# EAGLE board CT_schematic (EAGLE 7.6.0)

Size 100 x 80 mm. Coordinates in mm from the lower left corner, seen from the top.
Outline: 0,0 100,0 100,80 0,80 0,0
Copper layers (1*16): Top 0.035mm / dielectric 1.5mm / Bottom 0.035mm
Design rules "default": minimum track width 10mil, minimum drill 24mil, track to track 8mil, track to pad 8mil, pad to pad 8mil, via to via 8mil, smd to smd 8mil, copper to edge 40mil, drill to drill 8mil, minimum pad ring 10mil, minimum via ring 8mil, stop-mask expansion 4mil, vias tented up to drill 0mil, thermal gap 10mil

## Footprints (pad centres in the part's own frame; a part is rotated, then mirrored left to right if it is on the bottom)
C0603 = smd 0.8 x 0.8: 1 -0.762,0; 2 0.762,0
C0402 = smd 0.5 x 0.5: 1 -0.508,0; 2 0.508,0
C1210 = smd 1.2 x 2.5: 1 -1.524,0; 2 1.524,0
EXV-9H = smd 3.505 x 1.676: 1 -2.857,0; 2 2.857,0
PJ-037B_PACKAGE = drill 3.7 square: 1 12,0 | drill 3.2 square: 2 6,0
R0603 = smd 0.8 x 0.8: 1 -0.762,0; 2 0.762,0
WLCSP48 = smd 0.28 x 0.28: A1 0,0; A2 0.4,0; A3 0.8,0; A4 1.2,0; A5 1.6,0; A6 2,0; A7 2.4,0; B1 0,-0.4; B2 0.4,-0.4; B3 0.8,-0.4; B4 1.2,-0.4; B5 1.6,-0.4; B6 2,-0.4; B7 2.4,-0.4; C1 0,-0.8; C2 0.4,-0.8; C3 0.8,-0.8; C4 1.2,-0.8; C5 1.6,-0.8; C6 2,-0.8; C7 2.4,-0.8; D1 0,-1.2; D2 0.4,-1.2; D3 0.8,-1.2; D4 1.2,-1.2; D5 1.6,-1.2; D6 2,-1.2; D7 2.4,-1.2; E1 0,-1.6; E2 0.4,-1.6; E3 0.8,-1.6; E4 1.2,-1.6; E5 1.6,-1.6; E6 2,-1.6; E7 2.4,-1.6; F1 0,-2; F2 0.4,-2; F3 0.8,-2; F4 1.2,-2; F5 1.6,-2; F6 2,-2; F7 2.4,-2; G1 0,-2.4; G2 0.4,-2.4; G3 0.8,-2.4; G4 1.2,-2.4; G5 1.6,-2.4; G6 2,-2.4; G7 2.4,-2.4
TDFN-8/6MM = smd 0.3 x 0.75: 1 0,0; 2 0.5,0; 3 1,0; 4 1.5,0; 5 1.5,3; 6 1,3; 7 0.5,3; 8 0,3
SOIC-8 = smd 1.6 x 0.6: 1 -2.7,1.905 | smd 1.55 x 0.6: 2 -2.7,0.635; 3 -2.7,-0.635; 4 -2.7,-1.905; 5 2.7,-1.905; 6 2.7,-0.635; 7 2.7,0.635; 8 2.7,1.905
182-009-MALE = drill 1.194 pad 1.524 octagon: 1 -5.537,10.923; 2 -2.769,10.923; 3 0,10.923; 4 2.769,10.923; 5 5.537,10.923; 6 -4.153,8.08; 7 -1.384,8.08; 8 1.384,8.08; 9 4.153,8.08 | hole 3.048: -12.446,9.501; 12.446,9.501
TSSOP20-I = smd 0.4 x 1.35: 1 -2.925,-2.875; 2 -2.275,-2.875; 3 -1.625,-2.875; 4 -0.975,-2.875; 5 -0.325,-2.875; 6 0.325,-2.875; 7 0.975,-2.875; 8 1.625,-2.875; 9 2.275,-2.875; 10 2.925,-2.875; 11 2.925,2.875; 12 2.275,2.875; 13 1.625,2.875; 14 0.975,2.875; 15 0.325,2.875; 16 -0.325,2.875; 17 -0.975,2.875; 18 -1.625,2.875; 19 -2.275,2.875; 20 -2.925,2.875
HTSS-105-01-G-D = drill 1 pad 1.8 square: 1 0,0 | drill 1 pad 1.8: 2 0,2.54; 3 2.54,0; 4 2.54,2.54; 5 5.08,0; 6 5.08,2.54; 7 7.62,0; 8 7.62,2.54; 9 10.16,0; 10 10.16,2.54
ABS07-32.768KHZ-7-T = smd 1.1 x 2.4: 1 -2.5,0; 2 0,0
ASFL1 = smd 1.7 x 1.5: 1 -1.27,-1.1; 2 1.27,-1.1; 3 1.27,1.1; 4 -1.27,1.1
SOIC-8_EP = smd 1.6 x 0.533: 1 -2.921,1.905; 2 -2.921,0.635; 3 -2.921,-0.635; 4 -2.921,-1.905; 5 2.921,-1.905; 6 2.921,-0.635; 7 2.921,0.635; 8 2.921,1.905 | smd 2.54 x 3.302: EPAD 0,0 | drill 0.406 pad 0.406: P$1 -0.508,0.635; P$2 0.381,0.635; P$3 -0.508,-0.635; P$4 0.381,-0.635
WSON-8 = smd 0.3 x 0.6: 1 -0.75,0; 2 0.05,0; 3 0.85,0; 4 1.65,0; 5 1.65,3.8; 6 0.85,3.8; 7 0.05,3.8; 8 -0.75,3.8 | smd 3 x 2.6: PAD 0.45,1.9
SON-6 = smd 0.55 x 0.3: 1 -0.355,0.5 | smd 0.52 x 0.3: 2 -0.37,0; 3 -0.37,-0.5; 4 0.37,-0.5; 5 0.37,0; 6 0.37,0.5
SW_4-1437565-2 = smd 1.4 x 2.1: 1 -2.23,4.55; 2 -2.23,-4.55; 3 2.23,4.55; 4 2.23,-4.55
LGM67K-G1J2-24-Z = smd 0.8 x 1.4: A -2,0; C 0,0
NC7SZ125M5X = smd 1.3 x 0.7: 1 -1.3,0.95; 2 -1.3,0; 3 -1.3,-0.95; 4 1.3,-0.95; 5 1.3,0.95

## Placement (x,y rotation side)
C1  1e-06  [C0603]  -38.1,69.85 0 top  (outside the outline)
C2  1e-07  [C0603]  -41.91,69.85 0 top  (outside the outline)
C3  1e-07  [C0603]  -45.72,69.85 0 top  (outside the outline)
C4  1e-07  [C0603]  -49.53,69.85 0 top  (outside the outline)
C5  1e-07  [C0603]  -53.34,69.85 0 top  (outside the outline)
C6  1e-07  [C0603]  -57.15,69.85 0 top  (outside the outline)
C7  4.7e-06  [C0603]  -34.29,69.85 0 top  (outside the outline)
C8  1e-08  [C0603]  -60.96,69.85 0 top  (outside the outline)
C9  1e-06  [C0603]  -64.77,69.85 0 top  (outside the outline)
C10  1e-11  [C0402]  -53.34,74.93 0 top  (outside the outline)
C11  1e-11  [C0402]  -57.15,74.93 0 top  (outside the outline)
C12  1e-08  [C0402]  -60.96,74.93 0 top  (outside the outline)
C13  1e-08  [C0402]  -64.77,74.93 0 top  (outside the outline)
C14  1e-06  [C0603]  -68.58,69.85 0 top  (outside the outline)
C15  1e-06  [C0603]  -72.39,69.85 0 top  (outside the outline)
C16  1e-07  [C0402]  -68.58,74.93 0 top  (outside the outline)
C17  1e-07  [C0402]  -72.39,74.93 0 top  (outside the outline)
C18  1e-07  [C0402]  -76.2,74.93 0 top  (outside the outline)
C19  1e-07  [C0402]  -15.24,80.01 0 top  (outside the outline)
C20  1e-07  [C0402]  -19.05,80.01 0 top  (outside the outline)
C21  1e-07  [C0402]  -22.86,80.01 0 top  (outside the outline)
C22  1e-07  [C0402]  -26.67,80.01 0 top  (outside the outline)
C23  1e-07  [C0402]  -30.48,80.01 0 top  (outside the outline)
C24  1e-07  [C0402]  -34.29,80.01 0 top  (outside the outline)
C25  1e-07  [C0402]  -38.1,80.01 0 top  (outside the outline)
C26  1e-07  [C0402]  -41.91,80.01 0 top  (outside the outline)
C27  1e-07  [C0402]  -45.72,80.01 0 top  (outside the outline)
C28  1e-08  [C0402]  -49.53,80.01 0 top  (outside the outline)
C29  1e-05  [C1210]  -72.39,57.15 0 top  (outside the outline)
C30  1e-05  [C1210]  -16.51,63.5 0 top  (outside the outline)
C31  1e-05  [C1210]  -22.86,63.5 0 top  (outside the outline)
C32  1e-05  [C1210]  -29.21,63.5 0 top  (outside the outline)
C33  1e-06  [C0603]  -76.2,69.85 0 top  (outside the outline)
C34  1e-05  [C1210]  -35.56,63.5 0 top  (outside the outline)
C35  1e-07  [C0402]  -53.34,80.01 0 top  (outside the outline)
C36  0.0001  [EXV-9H]  -54.61,48.26 0 top  (outside the outline)
C37  0.0001  [EXV-9H]  -66.04,48.26 0 top  (outside the outline)
C38  1e-08  [C0402]  -57.15,80.01 0 top  (outside the outline)
J1  PJ-037B  [PJ-037B_PACKAGE]  -67.31,7.62 0 top  (outside the outline)
R1  10000.0  [R0603]  -15.24,69.85 0 top  (outside the outline)
R2  1000.0  [R0603]  -15.24,74.93 0 top  (outside the outline)
R3  1600.5  [R0603]  -19.05,74.93 0 top  (outside the outline)
R4  4700.0  [R0603]  -22.86,74.93 0 top  (outside the outline)
R5  2200.0  [R0603]  -26.67,74.93 0 top  (outside the outline)
R6  2200.0  [R0603]  -30.48,74.93 0 top  (outside the outline)
R7  2200.0  [R0603]  -34.29,74.93 0 top  (outside the outline)
R8  2200.0  [R0603]  -38.1,74.93 0 top  (outside the outline)
R9  10000.0  [R0603]  -20.32,69.85 0 top  (outside the outline)
R10  120.0  [R0603]  -41.91,74.93 0 top  (outside the outline)
R11  4031.5447154472  [R0603]  -50.8,63.5 0 top  (outside the outline)
R12  2200.0  [R0603]  -45.72,74.93 0 top  (outside the outline)
R13  100000.0  [R0603]  -55.88,63.5 0 top  (outside the outline)
R14  300000.0  [R0603]  -60.96,63.5 0 top  (outside the outline)
R15  100000.0  [R0603]  -66.04,63.5 0 top  (outside the outline)
R16  10000.0  [R0603]  -25.4,69.85 0 top  (outside the outline)
R17  10000.0  [R0603]  -30.48,69.85 0 top  (outside the outline)
R18  9100.0  [R0603]  -49.53,74.93 0 top  (outside the outline)
R19  680000.0  [R0603]  -71.12,63.5 0 top  (outside the outline)
R20  120000.0  [R0603]  -76.2,63.5 0 top  (outside the outline)
U1  STM32L431CBYx  [WLCSP48]  -25.4,58.42 0 top  (outside the outline)
U2  24AA01T-I/MNY  [TDFN-8/6MM]  -43.18,38.1 0 top  (outside the outline)
U3  24AA04-I/MC  [TDFN-8/6MM]  -55.88,38.1 0 top  (outside the outline)
U4  MCP2562-E/SN  [SOIC-8]  -68.58,39.37 0 top  (outside the outline)
U5  182-009-113R531  [182-009-MALE]  -36.83,6.35 0 top  (outside the outline)
U6  SP3203ECY-L/TR  [TSSOP20-I]  -43.18,27.94 0 top  (outside the outline)
U7  HTSS-105-01-G-D  [HTSS-105-01-G-D]  -77.47,26.67 0 top  (outside the outline)
U8  SP3203ECY-L/TR  [TSSOP20-I]  -58.42,27.94 0 top  (outside the outline)
U9  HTSS-105-01-G-D  [HTSS-105-01-G-D]  -27.94,38.1 0 top  (outside the outline)
U10  ABS07-32.768KHZ-7-T  [ABS07-32.768KHZ-7-T]  -43.18,57.15 0 top  (outside the outline)
U11  ASFL1-25MHZ-NCS  [ASFL1]  -45.72,48.26 0 top  (outside the outline)
U12  MIC5234YME  [SOIC-8_EP]  -52.07,55.88 0 top  (outside the outline)
U13  LP2951ACSDX/NOPB  [WSON-8]  -29.21,46.99 0 top  (outside the outline)
U14  TPS3895ADRYR  [SON-6]  -59.69,78.74 0 top  (outside the outline)
U15  4-1437565-2  [SW_4-1437565-2]  -27.94,27.94 0 top  (outside the outline)
U16  Q65110A2395  [LGM67K-G1J2-24-Z]  -60.96,57.15 0 top  (outside the outline)
U17  nc7sz125m5x  [NC7SZ125M5X]  -40.64,63.5 0 top  (outside the outline)

## Library data of the parts
C1-C38 J1 R1-R20 U1-U17 = circuit_tree

## Nets
CLK_CRYSTAL_U1_C6: C10.1 U1.C6 U10.1
CLK_CRYSTAL_U1_C7: C11.1 U1.C7 U10.2
CLK_U1_D7: U1.D7 U11.3
GND: C1.2 C2.2 C3.2 C4.2 C5.2 C6.2 C7.2 C8.2 C9.2 C10.2 C11.2 C12.2 C13.2 C14.2 C15.2 C16.2 C17.2 C20.2 C21.2 C22.2 C23.2 C26.2 C27.2 C28.2 C29.2 C30.2 C31.2 C32.2 C33.2 C34.2 C35.2 C36.2 C37.2 C38.2 J1.2 R2.2 R9.2 R12.2 R15.2 R18.2 R20.2 U1.A6 U1.B1 U1.E7 U1.G2 U2.4 U3.4 U4.2 U4.8 U5.5 U6.18 U7.9 U8.18 U9.9 U11.2 U12.7 U12.EPAD U13.3 U13.4 U13.PAD U14.2 U16.C U17.1 U17.3
NET_U1_A5: R9.1 U1.A5
NET_U1_C2: R6.1 U1.C2 U3.5
NET_U1_D2: R5.1 U1.D2 U3.6
NET_U1_D5: R4.1 U1.D5 U17.4
NET_U1_E1: R8.1 U1.E1 U2.5
NET_U1_E3: R7.1 U1.E3 U2.6
NET_U1_G6: R3.1 U1.G6 U16.A
NET_U1_G7: R1.1 U1.G7 U15.3 U15.4
NET_U4_6: R10.2 U4.6
NET_U5_2: R10.2 U4.6 U5.2
NET_U5_3: R10.1 U4.7 U5.3
NET_U6_1: C18.1 U6.1
NET_U6_2: C20.1 U6.2
NET_U6_3: C18.2 U6.3
NET_U6_4: C19.1 U6.4
NET_U6_5: C19.2 U6.5
NET_U6_6: C21.1 U6.6
NET_U6_20: U6.20
NET_U7_3: U6.14 U7.3
NET_U7_4: U6.13 U7.4
NET_U7_5: U6.17 U7.5
NET_U7_6: U6.16 U7.6
NET_U8_1: C24.1 U8.1
NET_U8_2: C26.1 U8.2
NET_U8_3: C24.2 U8.3
NET_U8_4: C25.1 U8.4
NET_U8_5: C25.2 U8.5
NET_U8_6: C27.1 U8.6
NET_U8_20: U8.20
NET_U9_3: U8.14 U9.3
NET_U9_4: U8.13 U9.4
NET_U9_5: U8.17 U9.5
NET_U9_6: U8.16 U9.6
NET_U12_4: R11.2 R12.1 U12.4
NET_U13_5: R13.1 U13.5
NET_U13_7: R14.2 R15.1 U13.7
NET_U14_1: R17.1 R18.1 U14.1
NET_U14_3: R19.2 R20.1 U14.3
NET_U14_4: R16.1 U14.4 U17.2
NET_U15_1: R2.1 U15.1 U15.2
PROC_CAN1_RX: U1.B5 U4.4
PROC_CAN1_TX: U1.C3 U4.1
PROC_LPUART1_CTS: U1.E2 U6.8
PROC_LPUART1_RTS: U1.F1 U6.10
PROC_LPUART1_RX: U1.E4 U6.11
PROC_LPUART1_TX: U1.E5 U6.7
PROC_USART1_CTS: U1.A4 U8.8
PROC_USART1_RTS: U1.A3 U8.10
PROC_USART1_RX: U1.D4 U8.11
PROC_USART1_TX: U1.C4 U8.7
VCC_S1_6V1: C29.1 C30.1 C33.1 C36.1 C37.1 J1.1 U12.5 U12.8 U13.8
VCC_TIER1_3V3: C1.1 C2.1 C3.1 C4.1 C5.1 C6.1 C7.1 C8.1 C9.1 C12.1 C13.1 C15.1 C16.1 C17.1 C22.1 C23.1 C28.1 C31.1 C32.1 C35.1 C38.1 R1.2 R3.2 R4.2 R5.2 R6.2 R7.2 R8.2 R11.1 R16.2 R17.2 R19.1 U1.A1 U1.A7 U1.B6 U1.F7 U1.G1 U2.7 U2.8 U3.7 U3.8 U4.5 U6.12 U6.19 U8.12 U8.19 U11.4 U12.1 U14.6 U17.5
VCC_TIER1_5V0: C14.1 C34.1 R13.2 R14.1 U4.3 U13.1

## Tracks (layer width: path | path; a pad name or v marks a point on that pad's centre or on a via)
CLK_CRYSTAL_U1_C6  (2 unrouted)
CLK_CRYSTAL_U1_C7  (2 unrouted)
CLK_U1_D7  (1 unrouted)
GND  (63 unrouted)
NET_U1_A5  (1 unrouted)
NET_U1_C2  (2 unrouted)
NET_U1_D2  (2 unrouted)
NET_U1_D5  (2 unrouted)
NET_U1_E1  (2 unrouted)
NET_U1_E3  (2 unrouted)
NET_U1_G6  (2 unrouted)
NET_U1_G7  (3 unrouted)
NET_U4_6  (1 unrouted)
NET_U5_2  (2 unrouted)
NET_U5_3  (2 unrouted)
NET_U6_1  (1 unrouted)
NET_U6_2  (1 unrouted)
NET_U6_3  (1 unrouted)
NET_U6_4  (1 unrouted)
NET_U6_5  (1 unrouted)
NET_U6_6  (1 unrouted)
NET_U7_3  (1 unrouted)
NET_U7_4  (1 unrouted)
NET_U7_5  (1 unrouted)
NET_U7_6  (1 unrouted)
NET_U8_1  (1 unrouted)
NET_U8_2  (1 unrouted)
NET_U8_3  (1 unrouted)
NET_U8_4  (1 unrouted)
NET_U8_5  (1 unrouted)
NET_U8_6  (1 unrouted)
NET_U9_3  (1 unrouted)
NET_U9_4  (1 unrouted)
NET_U9_5  (1 unrouted)
NET_U9_6  (1 unrouted)
NET_U12_4  (2 unrouted)
NET_U13_5  (1 unrouted)
NET_U13_7  (2 unrouted)
NET_U14_1  (2 unrouted)
NET_U14_3  (2 unrouted)
NET_U14_4  (2 unrouted)
NET_U15_1  (2 unrouted)
PROC_CAN1_RX  (1 unrouted)
PROC_CAN1_TX  (1 unrouted)
PROC_LPUART1_CTS  (1 unrouted)
PROC_LPUART1_RTS  (1 unrouted)
PROC_LPUART1_RX  (1 unrouted)
PROC_LPUART1_TX  (1 unrouted)
PROC_USART1_CTS  (1 unrouted)
PROC_USART1_RTS  (1 unrouted)
PROC_USART1_RX  (1 unrouted)
PROC_USART1_TX  (1 unrouted)
VCC_S1_6V1  (8 unrouted)
VCC_TIER1_3V3  (49 unrouted)
VCC_TIER1_5V0  (5 unrouted)